# EAGLE board v0.3 (EAGLE 9.3.2)
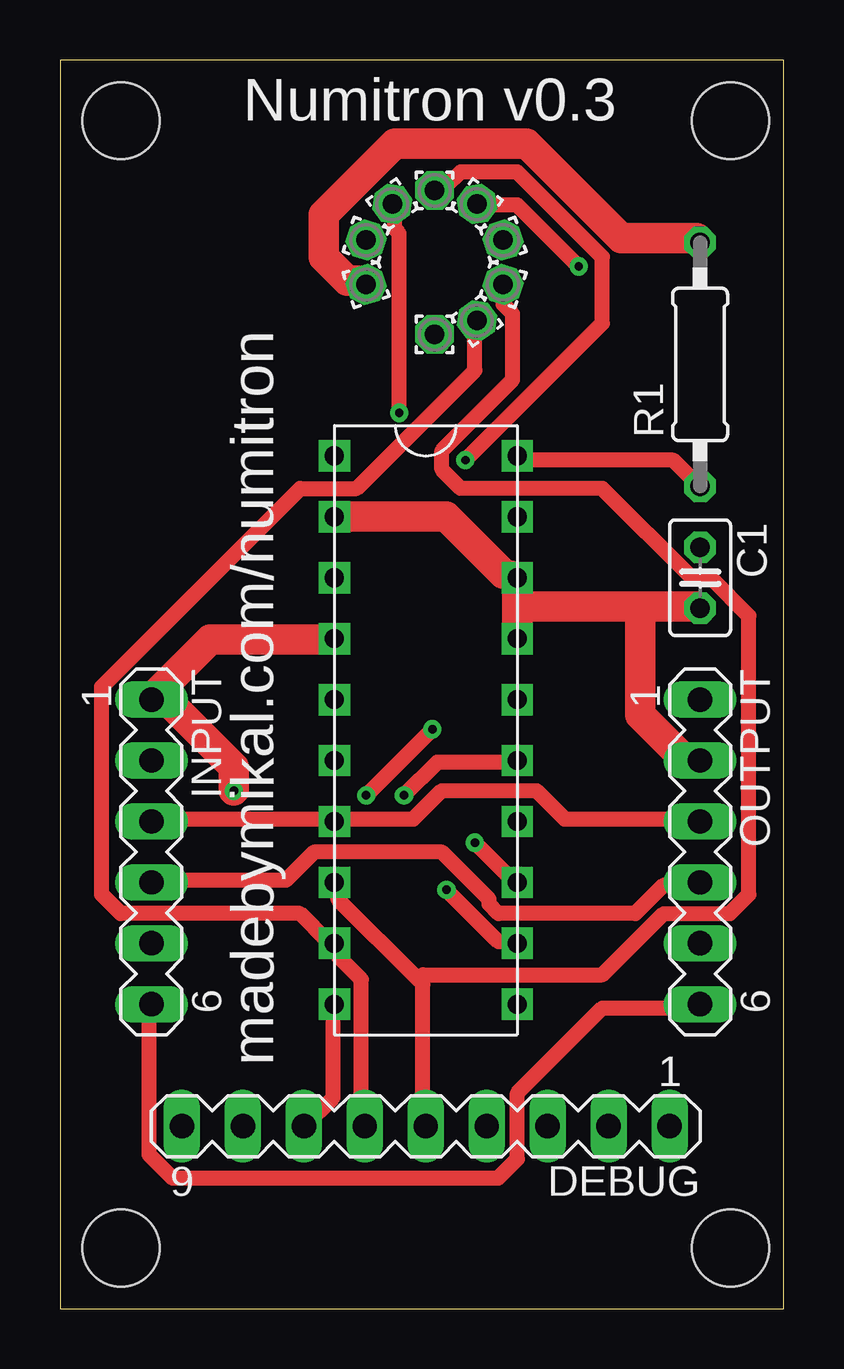
[diagram p0: board, top side]
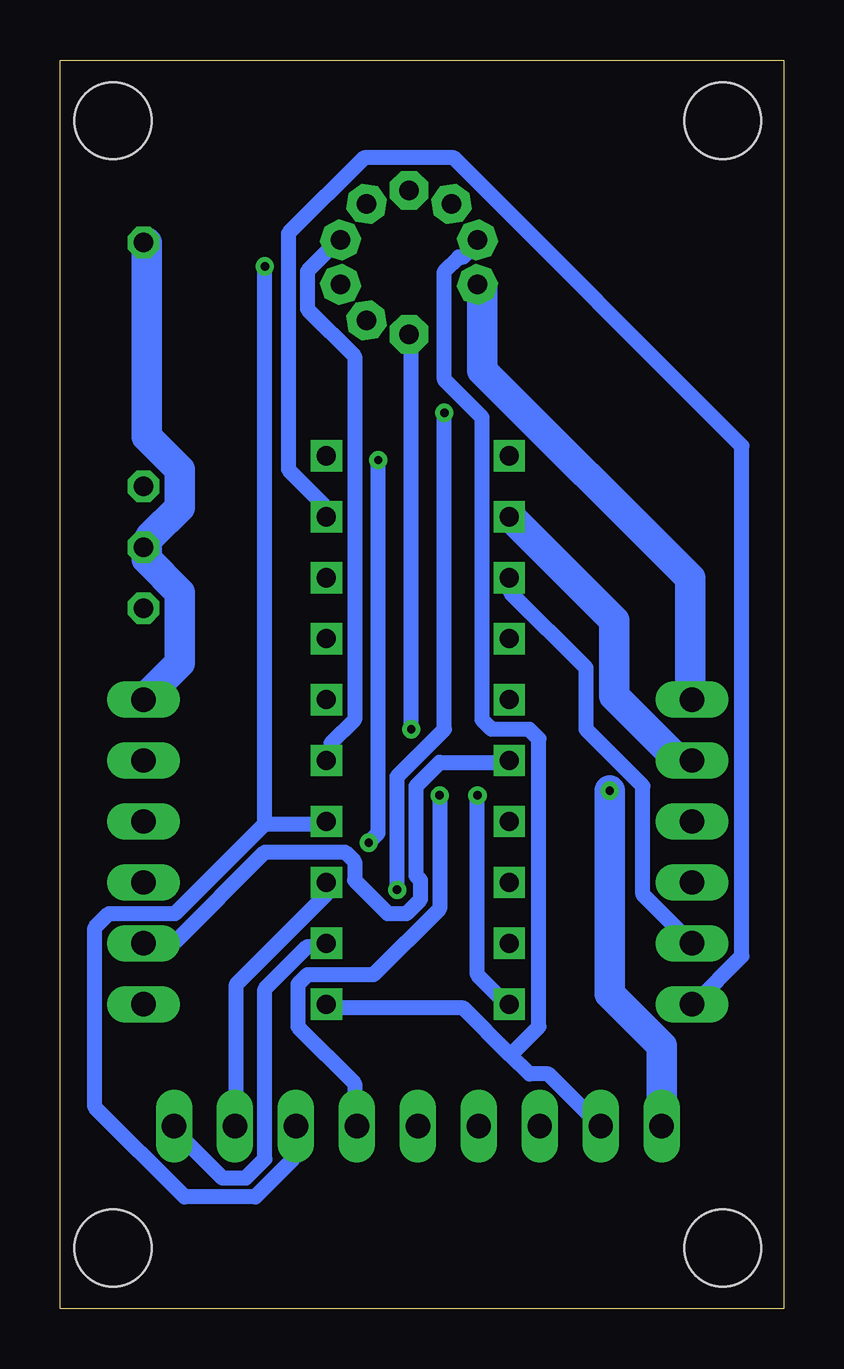
[diagram p1: board, bottom side, seen from below]

Size 30.15 x 52.06 mm. Coordinates in mm from the lower left corner, seen from the top.
Outline: 0,0 30.15,0 30.15,52.06 0,52.06 0,0
Copper layers (1*16): Top 0.035mm / dielectric 1.5mm / Bottom 0.035mm
Design rules "default": minimum track width 6mil, minimum drill 0.35mm, track to track 6mil, track to pad 6mil, pad to pad 6mil, via to via 6mil, smd to smd 6mil, copper to edge 40mil, drill to drill 6mil, minimum pad ring 10mil, minimum via ring 8mil, stop-mask expansion 4mil, vias tented up to drill 0mil, thermal gap 10mil
Net classes: 0 default: width 0.635 mm; 1 ground: width 1.27 mm; 2 vcc: width 1.27 mm; 3 audio: width 1.27 mm
Holes 3.2 mm at 2.54,49.53 27.94,49.53 27.94,2.54 2.54,2.54

## Footprints (pad centres in the part's own frame; a part is rotated, then mirrored left to right if it is on the bottom)
C025-025X050 = drill 0.813 octagon: 1 -1.27,0; 2 1.27,0
1,6/0,8 = drill 0.813 pad 1.6 octagon: 1 0,0
MA09-1 = drill 1.016 long: 1 -10.16,0; 2 -7.62,0; 3 -5.08,0; 4 -2.54,0; 5 0,0; 6 2.54,0; 7 5.08,0; 8 7.62,0; 9 10.16,0
MA06-1 = drill 1.016 long: 1 -6.35,0; 2 -3.81,0; 3 -1.27,0; 4 1.27,0; 5 3.81,0; 6 6.35,0
0207/10 = drill 0.813 octagon: 1 -5.08,0; 2 5.08,0
PDIP-20 = drill 0.8 square: P$1 -3.81,1.27; P$2 -3.81,3.81; P$3 -3.81,6.35; P$4 -3.81,8.89; P$5 -3.81,-1.27; P$6 -3.81,-3.81; P$7 -3.81,-6.35; P$8 -3.81,-8.89; P$9 -3.81,-11.43; P$10 -3.81,11.43; P$11 3.81,1.27; P$12 3.81,3.81; P$13 3.81,6.35; P$14 3.81,8.89; P$15 3.81,11.43; P$16 3.81,-1.27; P$17 3.81,-3.81; P$18 3.81,-6.35; P$19 3.81,-8.89; P$20 3.81,-11.43

## Placement (x,y rotation side)
C1  0.1uF  [C025-025X050]  26.67,30.48 270 top
CMN  [1,6/0,8]  12.75,42.7 198 top
DEBUG  [MA09-1]  15.24,7.62 180 top
DEC  [1,6/0,8]  12.75,44.55 162 top
INPUT  [MA06-1]  3.81,19.05 270 top
OUTPUT  [MA06-1]  26.67,19.05 270 top
R1  10K  [0207/10]  26.67,39.37 90 top
SEGA  [1,6/0,8]  13.84,46.05 126 top
SEGB  [1,6/0,8]  15.61,46.62 90 top
SEGC  [1,6/0,8]  17.37,46.05 144 top
SEGD  [1,6/0,8]  18.46,44.55 18 top
SEGE  [1,6/0,8]  18.46,42.7 342 top
SEGF  [1,6/0,8]  17.37,41.2 306 top
SEGG  [1,6/0,8]  15.61,40.62 270 top
U$1  [PDIP-20]  15.24,24.13 0 top

## Library data of the parts
C1 = rcl; SPICEPREFIX: C
CMN DEC SEGA SEGB SEGC SEGD SEGE SEGF SEGG = wirepad
DEBUG INPUT OUTPUT = con-lstb; OC_FARNELL: unknown; OC_NEWARK: unknown
R1 = rcl; SPICEPREFIX: R
U$1 = tpic6b595n

## Nets
G: INPUT.6 OUTPUT.6 U$1.P$14
GND [ground]: C1.2 INPUT.2 OUTPUT.2 U$1.P$4 U$1.P$12 U$1.P$13
N$1: DEBUG.1 SEGA.1 U$1.P$19
N$2: DEBUG.2 SEGB.1 U$1.P$18
N$3: DEBUG.3 SEGC.1 U$1.P$17
N$4: DEBUG.4 SEGD.1 U$1.P$16
N$5: DEBUG.5 SEGE.1 U$1.P$7
N$6: DEBUG.6 SEGF.1 U$1.P$8
N$7: DEBUG.7 SEGG.1 U$1.P$9
N$8: DEBUG.8 DEC.1 U$1.P$20
N$9: INPUT.5 U$1.P$3
N$10: OUTPUT.5 U$1.P$5
N$12: U$1.P$10
N$19: R1.1 U$1.P$15
RCK: INPUT.4 OUTPUT.4
SRCK: INPUT.3 OUTPUT.3 U$1.P$6
VCC [vcc]: C1.1 CMN.1 DEBUG.9 INPUT.1 OUTPUT.1 R1.2 U$1.P$2

## Tracks (layer width: path | path; a pad name or v marks a point on that pad's centre or on a via)
G
  Top 0.635: OUTPUT.6 26.54,12.55 22.6,12.55 19.06,9 19.06,6.25 18.27,5.46 4.69,5.46 3.7,6.45 3.7,12.55 INPUT.6
  Bottom 0.635: U$1.P$14 19.06,33.41 20.63,34.99 20.63,44.83 17.48,47.98 13.74,47.98 1.73,35.97 1.73,14.71 3.7,12.74 INPUT.6
GND
  Top 1.27: 19.06,29.28 19.06,30.46 U$1.P$13 18.47,30.66 16.1,33.02 U$1.P$4 | 19.06,29.28 19.06,28.1 U$1.P$12 | 19.06,29.28 24.17,29.28 | 24.17,29.28 26.54,29.28 C1.2 | 24.17,29.28 24.17,24.75 25.95,22.98 26.54,22.98 OUTPUT.2
  Bottom 1.27: INPUT.2 3.9,22.98 4.49,22.98 7.05,25.54 7.05,28.69 11.38,33.02 U$1.P$4
N$1  (via drill 0.35)
  Top 0.635: v14.13,37.35 14.13,44.83 13.94,45.03 13.94,46.01 SEGA.1 | v16.1,17.47 18.27,15.3 18.86,15.3 U$1.P$19
  Bottom 0.635: U$1.P$19 19.06,15.11 19.84,15.11 21.62,13.33 21.62,6.25 22.4,5.46 23.39,5.46 25.36,7.43 DEBUG.1 | v14.13,37.35 14.13,24.16 16.1,22.19 v16.1,17.47
N$2  (via drill 0.35)
  Top 0.635: v16.89,35.38 22.6,41.09 22.6,43.85 19.06,47.39 16.69,47.39 16.1,46.8 15.71,46.8 SEGB.1 | v17.29,19.44 18.86,17.86 U$1.P$18
  Bottom 0.635: U$1.P$18 19.06,17.67 19.06,17.27 22.8,13.53 22.8,7.63 DEBUG.2 | v16.89,35.38 16.89,19.83 v17.29,19.44
N$3  (via drill 0.35)
  Top 0.635: v21.62,43.45 19.06,46.01 17.48,46.01 SEGC.1
  Bottom 0.635: 21.62,20.23 19.06,20.23 U$1.P$17 | 21.62,20.23 25.36,16.48 28.11,16.48 28.7,15.89 28.7,8.41 24.96,4.67 22.01,4.67 20.43,6.25 20.43,7.43 DEBUG.3 | 21.62,20.23 v21.62,43.45
N$4  (via drill 0.35)
  Top 0.635: v14.33,21.41 15.71,22.78 18.86,22.78 U$1.P$16
  Bottom 0.635: U$1.P$16 18.86,22.98 18.86,23.57 17.88,24.55 17.88,39.71 19.84,41.68 19.84,43.26 18.47,44.63 SEGD.1 | v14.33,21.41 14.33,16.68 17.09,13.93 19.84,13.93 20.24,13.53 20.24,11.76 17.88,9.4 17.88,7.63 DEBUG.4
N$5
  Top 0.635: 14.92,13.73 15.12,13.53 15.12,7.63 DEBUG.5 | 14.92,13.73 11.58,17.08 11.58,17.67 U$1.P$7 | SEGE.1 18.47,42.67 18.47,41.88 18.86,41.48 18.86,38.73 15.91,35.78 15.91,34.99 16.69,34.2 22.6,34.2 26.34,30.46 27.13,30.46 28.7,28.89 28.7,17.27 27.91,16.48 25.16,16.48 22.6,13.93 15.12,13.93 14.92,13.73
N$6
  Top 0.635: DEBUG.6 12.56,7.63 12.56,13.73 11.58,14.71 11.58,15.11 U$1.P$8 11.18,15.3 10,16.48 2.52,16.48 1.73,17.27 1.73,25.93 10,34.2 12.36,34.2 17.29,39.12 17.29,41.09 SEGF.1
N$7  (via drill 0.35)
  Top 0.635: U$1.P$9 11.38,12.55 11.38,8.81 10.2,7.63 DEBUG.7 | v12.76,21.41 v15.51,24.16
  Bottom 0.635: v15.51,24.16 15.51,40.5 SEGG.1 | v12.76,21.41 12.76,13.93 11.58,12.74 U$1.P$9
N$8
  Bottom 0.635: 11.38,10.58 10.59,9.79 9.8,9.79 7.64,7.63 DEBUG.8 | 11.38,10.58 13.35,12.55 18.86,12.55 U$1.P$20 | 11.38,10.58 10.2,11.76 10.2,23.77 10.59,24.16 12.17,24.16 12.56,24.55 12.56,37.15 14.13,38.73 14.13,43.26 13.55,43.85 13.35,43.85 12.76,44.44 DEC.1
N$9
  Bottom 0.635: U$1.P$3 11.38,30.46 11.38,29.87 8.23,26.72 8.23,24.16 5.87,21.8 5.87,17.27 3.9,15.3 INPUT.5
N$10
  Bottom 0.635: U$1.P$5 11.58,22.78 14.33,22.78 15.32,21.8 15.32,18.06 15.12,17.86 15.12,17.08 15.71,16.48 16.5,16.48 17.88,17.86 17.88,18.65 18.27,19.04 21.62,19.04 25.36,15.3 26.54,15.3 OUTPUT.5
N$19
  Top 0.635: U$1.P$15 19.06,35.38 25.55,35.38 26.54,34.4 R1.1
RCK
  Top 0.635: INPUT.4 3.9,17.86 9.41,17.86 10.59,19.04 15.91,19.04 17.88,17.08 17.88,16.88 18.27,16.48 23.98,16.48 25.16,17.67 26.54,17.67 OUTPUT.4
SRCK
  Top 0.635: INPUT.3 3.9,20.42 11.38,20.42 U$1.P$6 11.58,20.42 14.73,20.42 15.91,21.6 19.84,21.6 21.02,20.42 26.54,20.42 OUTPUT.3
VCC  (via drill 0.35)
  Top 1.27: U$1.P$2 11.38,27.9 6.26,27.9 3.9,25.54 INPUT.1 4.49,25.34 7.24,22.59 v7.24,21.6 | R1.2 26.54,44.63 23.39,44.63 19.45,48.57 13.94,48.57 10.99,45.62 10.99,43.85 11.97,42.86 12.56,42.86 CMN.1
  Bottom 1.27: OUTPUT.1 26.54,25.54 25.16,26.92 25.16,29.87 26.54,31.25 26.54,31.64 C1.1 26.34,32.23 25.16,33.41 25.16,34.99 26.54,36.37 26.54,44.44 R1.2 | DEBUG.9 5.08,10.97 7.24,13.14 v7.24,21.6 | CMN.1 12.56,42.67 12.56,39.12 3.9,30.46 3.9,25.54 INPUT.1

## Text on the board
tPlace: Numitron v0.3 | madebymikal.com/numitron